# Altium PCB FLUOLAMP_8W_DRIVER.PcbDoc
Units mm, origin at the board's own origin, x right, y up, seen from the top; angles counter-clockwise.
Board outline 78 x 34.8 mm, 2 copper layers (Top Layer, Bottom Layer); 12 components, 10 nets, 27 pads, 2 vias.
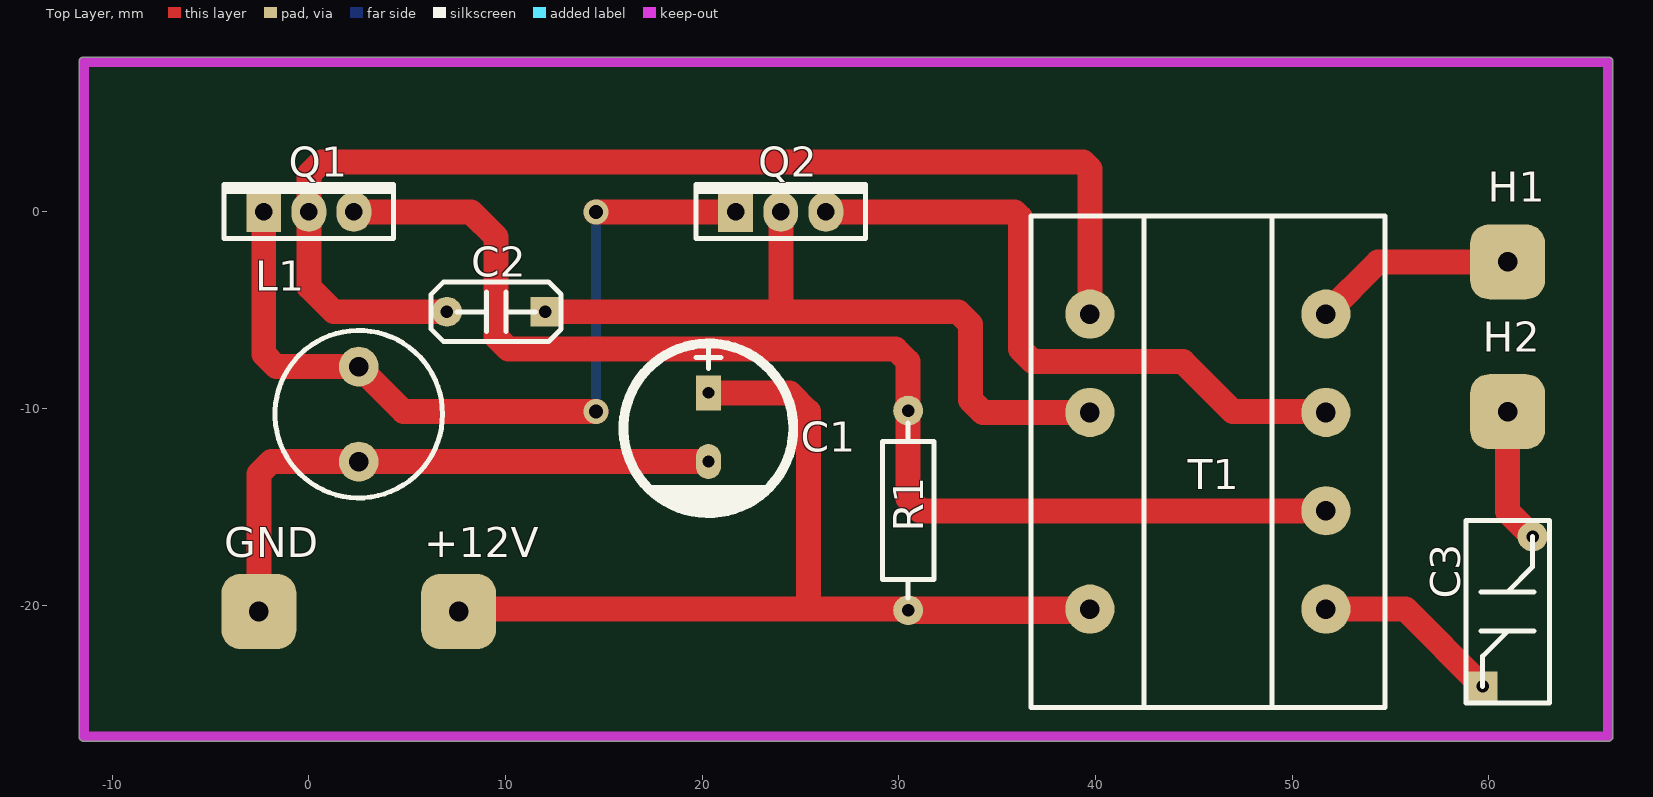
[diagram p0: Top Layer view]
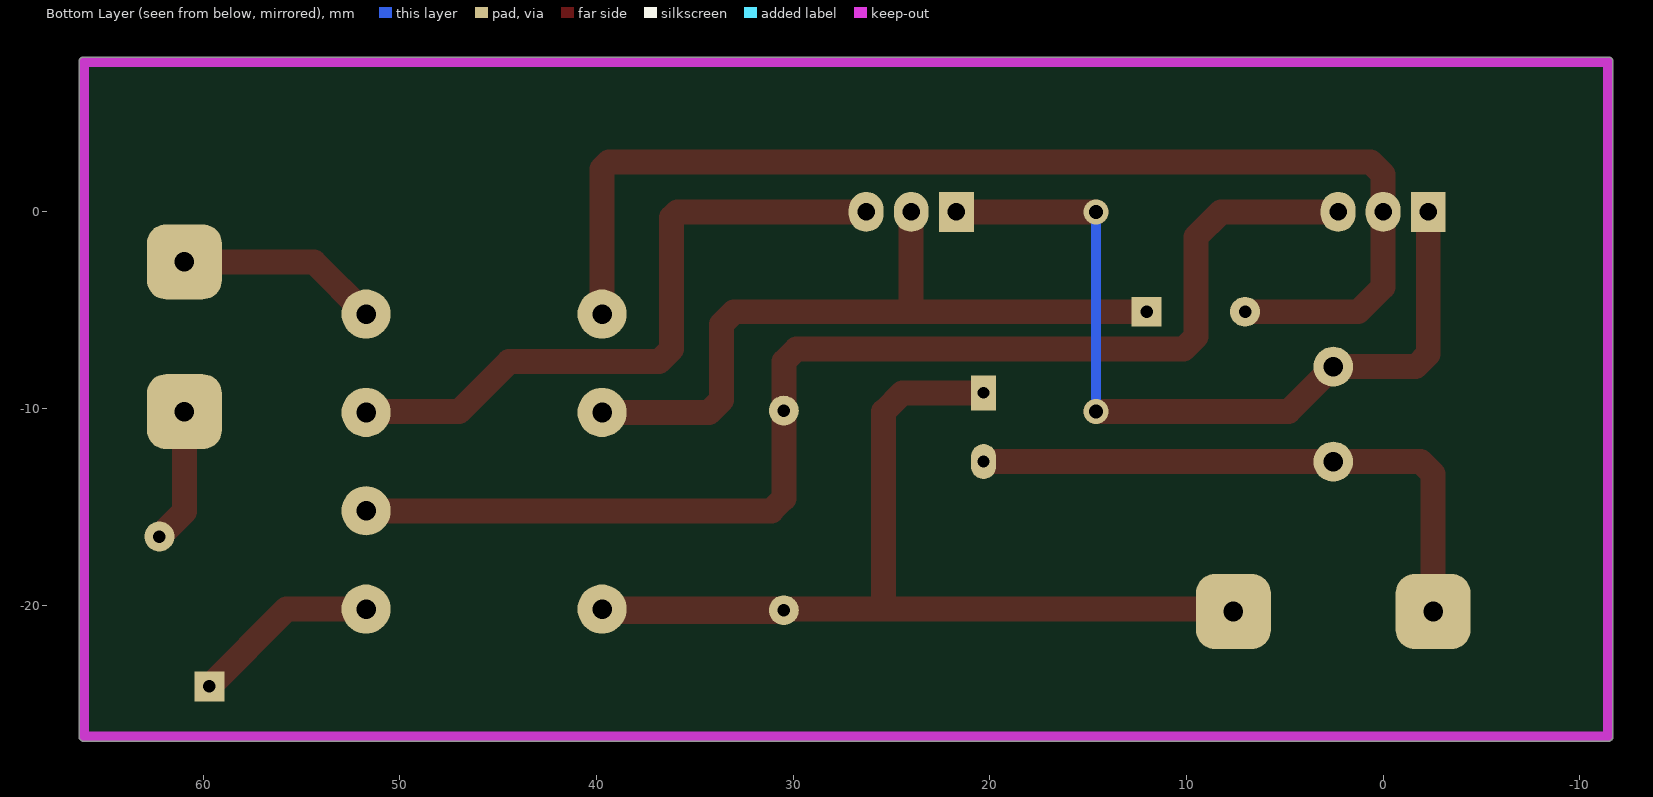
[diagram p1: Bottom Layer view, seen from below]
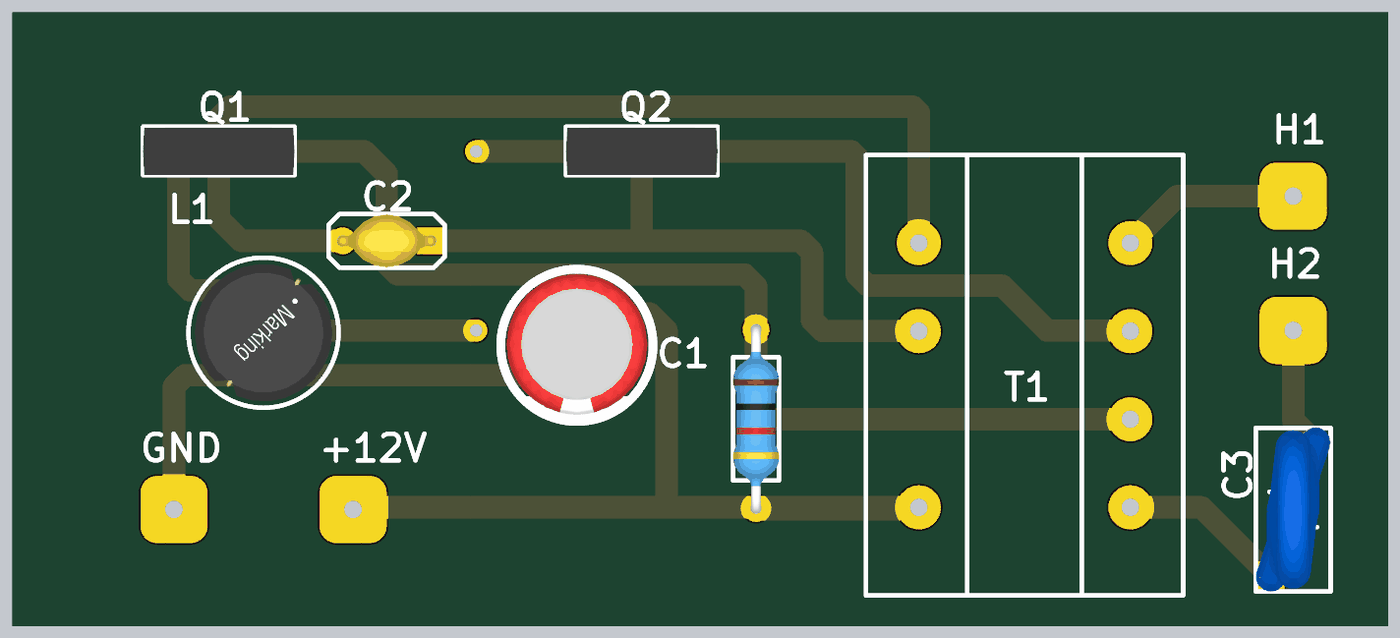
[diagram p2: 3D render of the assembled board from above, using the file's embedded part models]

## Layer stack, top to bottom
Top Solder: solder mask 0.0102, Solder Resist, Dk 3.5
Top Layer: signal copper 0.0356
Dielectric 1: dielectric 0.32, FR-4, Dk 4.8
Bottom Layer: signal copper 0.0356
Bottom Solder: solder mask 0.0102, Solder Resist, Dk 3.5

## Board outline
-11.684,-26.67 -11.684,7.62 cw(c-11.43,7.62) -11.43,7.874 66.064,7.874 cw(c66.064,7.62) 66.319,7.62 66.319,-26.67 cw(c66.064,-26.67) 66.052,-26.924 cw(c66.04,-26.67) 66.04,-26.924 -11.43,-26.924 cw(c-11.43,-26.67)

## Design rules (kind name [scope] priority, off if disabled: settings)
Clearance [All] p1: gap=0.254 ignorepadtopadclearanceinfootprint=FALSE except(0: Arc-Hole Track-Hole SMDPad-Hole THPad-Hole Via-Hole Fill-Hole Poly-Hole Region-Hole Text-Hole)
PolygonConnect [All] p1: connectstyle=Relief reliefconductorwidth=0.254 reliefentries=4 polygonreliefangle="90 Angle" airgapwidth=0.254
RoutingVias [All] p1: holewidth=0.711 width=1.27 viastyle="Through Hole" minholewidth=0.711 minwidth=1.27 maxholewidth=0.711 maxwidth=1.27
SolderMaskExpansion [All] p1: expansion=0.102 istentingtop=FALSE
Width [All] p1: maxlimit=1.27 minlimit=0.254 preferedwidth=0.508
30 further rules are at their usual default settings.

## Components (designator, comment, footprint, x,y, rotation, side; value= is the part's Value field where it differs from the comment)
+12V "SolderPoint" SolderPoint 7.62,-20.32 r180 top
C1 "1000uF" CAP_RAD_7mm 20.32,-11.005 r270 top
C2 "47nF" CAP_DISC_4x3_YL-LM 9.525,-5.08 r180 top
C3 "100pF" CAP_DISC_9x3_BL 60.96,-20.32 r90 top
GND "SolderPoint" SolderPoint -2.54,-20.32 r0 top
H1 "SolderPoint" SolderPoint 60.96,-2.54 r90 top (schematic designator HighVotage1)
H2 "SolderPoint" SolderPoint 60.96,-10.16 r270 top (schematic designator HighVotage2)
L1 "470uH" INDUCTOR_470uH 2.54,-8.382 r180 top
Q1 "D882" TO-126 0,0 r0 top
Q2 "D882" TO-126 24,0 r0 top
R1 "2K7" RES-0.25W-H-MF 30.48,-15.182 r270 top
T1 "TransFLUOLAMP_8W" TRANS_FLUOLAMP_8W 45.72,-12.7 r90 top

## Footprints (in the part's own frame and the unit in brackets; to place one, negate y for a bottom-side part, rotate by r counter-clockwise, add the part's x,y. Pads: shape width x height; smd on the part's side, far side on the other; paste and mask are expansions set on the pad)
CAP_DISC_4x3_YL-LM [mil]
  rect 60x60 hole 25: 1(-98.43,0)
  round 60 hole 25: 2(98.43,0)
  silkscreen extent -130,-60 130,60, body extent -110,-59 110,59, height 216
CAP_DISC_9x3_BL [mil]
  rect 60x60 hole 25: 1(-150,50)
  round 60 hole 25: 2(150,-50)
  silkscreen extent -183,-84 182,84, body extent -183,-83 183,83, height 457
CAP_RAD_7mm [mm]
  rect 1.778x1.27 hole 0.6: 1(-1.805,0)
  oval 1.778x1.27 hole 0.6: 2(1.695,0)
  silkscreen extent -4.32,-4.31 4.32,4.32, body extent -4.06,-4 3.94,4, height 11.33
INDUCTOR_470uH [mil]
  round 80 hole 39.37: 1(0,170) 2(0,-20)
  silkscreen extent -168,-93 168,243, body extent -217,-142 217,292, height 378
RES-0.25W-H-MF [mil]
  round 60 hole 25: 1(-199.8,0) 2(199.8,0.01)
  silkscreen extent -175,-51 175,51, body extent -211,-51 211,51, height 106
SolderPoint [mm]
  rrect50% 3.81x3.81 hole 1: 1(0,0)
TO-126 [mil]
  rect 70x80 hole 35.43: 1(-90.16,0)
  oval 70x80 hole 35.43: 2(0,0) 3(90.16,0)
  silkscreen extent -169,-53 169,55, body extent -169,-53 169,55, height 622
TRANS_FLUOLAMP_8W [mm]
  round 2.5 hole 1: 1(-7.5,6) 3(2.5,6) 4(7.5,6) 5(7.5,-6) 6(2.5,-6) 7(-2.5,-6) 8(-7.5,-6)
  silkscreen extent -12.5,-9 12.5,9

## Part data
C1: library part Capacitor(Radian)
C2 C3: library part Capacitors(Disc)
L1: library part Inductor
Q1 Q2: library part "D882 (TO-126)"
R1: library part "Resistors THD"

## Via types
v1: diameter 1.27, hole 0.711, Top Layer to Bottom Layer, 2 vias

## Nets (pads, with @x,y where several pads share a name; then routed paths per layer and width w, separated by ;. In a path a pad name is that pad's centre, name@x,y a point inside that pad or via, vN(x,y) a via of type N, cw(c..) or ccw(c..) an arc to the next point about the centre after c; other vN are vias at no path point)
Net+12V_1: +12V.1 C1.1 R1.2 T1.1 | length 57
  Top Layer w1.27: +12V.1 7.63,-20.31 7.74,-20.2 25.4,-20.2 ; C1.1 24.44,-9.2 25.4,-10.16 25.4,-20.2 ; R1.2@30.48,-20.31 39.61,-20.31 T1.1 25.4,-20.2
NetC1_2: C1.2 GND.1 L1.1 | length 30.1
  Top Layer w1.27: GND.1 -2.54,-13.335 -1.905,-12.7 L1.1 C1.2
NetC2_1: C2.1 Q2.2 T1.3 | length 37.2
  Top Layer w1.27: C2.1 24,-5.08 ; Q2.2 24,-5.08 ; T1.3 34.29,-10.2 33.655,-9.565 33.655,-5.715 33.02,-5.08 24,-5.08
NetC2_2: C2.2 Q1.2 T1.4 | length 60.7
  Top Layer w1.27: C2.2@6.985,-5.08 1.27,-5.08 0,-3.81 Q1.2 0,1.905 0.635,2.54 39.37,2.54 39.72,2.19 T1.4
NetC3_1: C3.1 T1.8 | length 9.6
  Top Layer w1.27: T1.8 55.76,-20.2 C3.1
NetC3_2: C3.2 H2.1 | length 6.9
  Top Layer w1.27: H2.1 60.96,-15.24 C3.2
NetHighVotage1_1: H1.1 T1.5 | length 10.3
  Top Layer w1.27: T1.5 54.38,-2.54 H1.1
NetL1_2: L1.2 Q1.1 Q2.1 | length 42.6
  Top Layer w1.27: Q1.1 -2.29,-7.235 -1.651,-7.874 L1.2 4.826,-10.16 v1(14.605,-10.16) ; v1(14.605,0) Q2.1
  Bottom Layer w0.508: v1(14.605,-10.16) v1(14.605,0)
NetQ1_3: Q1.3 R1.1 T1.7 | length 62.8
  Top Layer w1.27: Q1.3 8.255,0 9.525,-1.27 9.525,-6.35 10.16,-6.985 29.845,-6.985 30.48,-7.62 R1.1 30.48,-14.565 31.115,-15.2 T1.7
NetQ2_3: Q2.3 T1.6 | length 33.6
  Top Layer w1.27: Q2.3 35.897,0 36.195,-0.298 36.195,-6.985 36.83,-7.62 44.45,-7.62 46.99,-10.16 51.68,-10.16 T1.6

## Keep-outs
Keep-Out Layer:
  lines w0.508: 66.04,-26.67 -11.43,-26.67 -11.43,7.62 66.064,7.62 66.064,-26.67